# EAGLE board eagle_testfile (EAGLE 6.5.0)
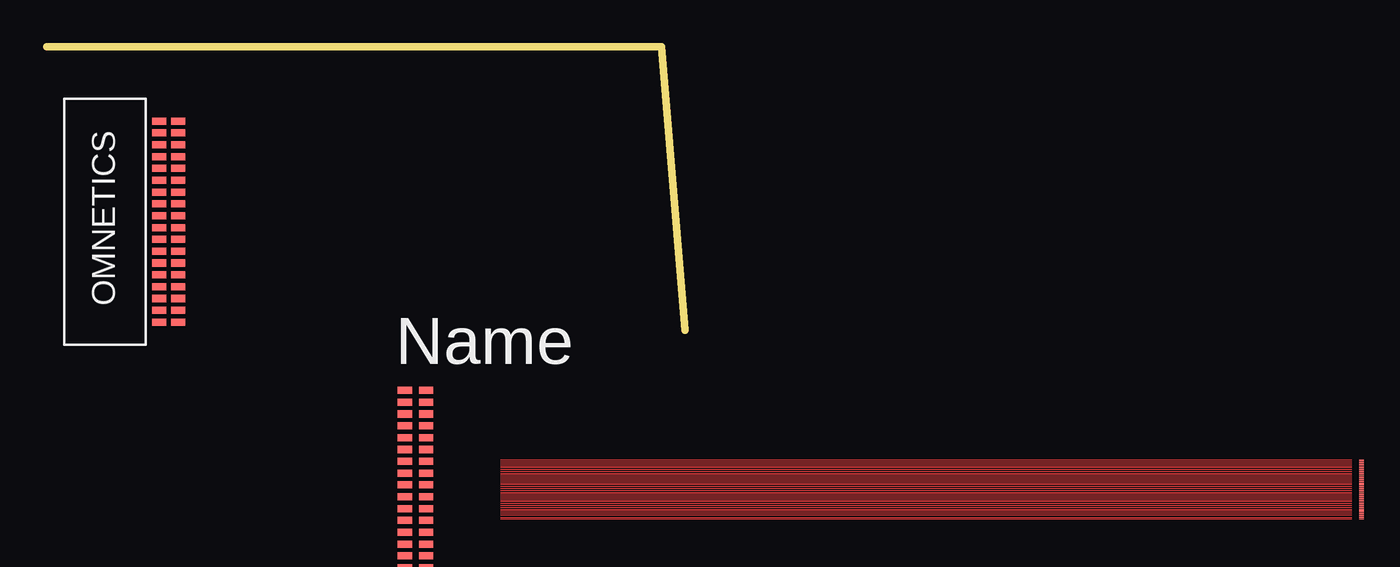
[diagram p0: board, top side]

Size 34.29 x 15.24 mm. Coordinates in mm from the lower left corner, seen from the top.
Outline: 34.29,0 33.02,15.24 0,15.24
Copper layers (1*16): Top 0.035mm / dielectric 1.5mm / Bottom 0.035mm
Design rules "default": minimum track width 10mil, minimum drill 24mil, track to track 8mil, track to pad 8mil, pad to pad 8mil, via to via 8mil, smd to smd 8mil, copper to edge 40mil, drill to drill 8mil, minimum pad ring 10mil, minimum via ring 8mil, stop-mask expansion 4mil, vias tented up to drill 0mil, thermal gap 10mil

## Footprints (pad centres in the part's own frame; a part is rotated, then mirrored left to right if it is on the bottom)
OMNETICS_A79026 = smd 0.762 x 0.381: P$1 0,0.635; P$2 0,0; P$3 0,1.27; P$4 0,1.905; P$5 0,2.54; P$6 0,3.175; P$7 0,3.81; P$8 0,4.445; P$9 0,5.08; P$10 0,5.715; P$11 0,6.35; P$12 0,6.985; P$13 0,7.62; P$14 0,8.255; P$15 0,8.89; P$16 0,9.525; P$17 0,10.16; P$18 0,10.795; P$19 1.143,0.635; P$20 1.143,0; P$21 1.143,1.27; P$22 1.143,1.905; P$23 1.143,2.54; P$24 1.143,3.175; P$25 1.143,3.81; P$26 1.143,4.445; P$27 1.143,5.08; P$28 1.143,5.715; P$29 1.143,6.35; P$30 1.143,6.985; P$31 1.143,7.62; P$32 1.143,8.255; P$33 1.143,8.89; P$34 1.143,9.525; P$35 1.143,10.16; P$36 1.143,10.795
32CH_SMD_PADS = smd 0.254 x 0.051: P$1 0,0; P$2 0,0.102; P$3 0,0.203; P$4 0,0.305; P$5 0,0.406; P$6 0,0.508; P$7 0,0.61; P$8 0,0.711; P$9 0,0.813; P$10 0,0.914; P$11 0,1.016; P$12 0,1.118; P$13 0,1.219; P$14 0,1.321; P$15 0,1.422; P$16 0,1.524; P$17 0,1.626; P$18 0,1.727; P$19 0,1.829; P$20 0,1.93; P$21 0,2.032; P$22 0,2.134; P$23 0,2.235; P$24 0,2.337; P$25 0,2.438; P$26 0,2.54; P$27 0,2.642; P$28 0,2.743; P$29 0,2.845; P$30 0,2.946; P$31 0,3.048; P$32 0,3.15
OMNETICS_A79024 = smd 0.381 x 0.762: B1 -5.397,0.711; B2 -4.763,0.711; B3 -4.128,0.711; B4 -3.493,0.711; B5 -2.857,0.711; B6 -2.223,0.711; B7 -1.587,0.711; B8 -0.953,0.711; B9 -0.318,0.711; B10 0.318,0.711; B11 0.953,0.711; B12 1.587,0.711; B13 2.223,0.711; B14 2.857,0.711; B15 3.493,0.711; B16 4.128,0.711; B17 4.763,0.711; B18 5.397,0.711; T1 -5.397,1.727; T2 -4.763,1.727; T3 -4.128,1.727; T4 -3.493,1.727; T5 -2.857,1.727; T6 -2.223,1.727; T7 -1.587,1.727; T8 -0.953,1.727; T9 -0.318,1.727; T10 0.318,1.727; T11 0.953,1.727; T12 1.587,1.727; T13 2.223,1.727; T14 2.857,1.727; T15 3.493,1.727; T16 4.128,1.727; T17 4.763,1.727; T18 5.397,1.727

## Placement (x,y rotation side)
E$1  [OMNETICS_A79026]  19.24,-14.01 0 top  (outside the outline)
E$2  [32CH_SMD_PADS]  70.61,-10.12 0 top  (outside the outline)
OMNETICS  [OMNETICS_A79024]  5.33,5.84 270 top

## Library data of the parts
E$1 = Omentics_A79026_gg
E$2 = 32ch_SMD_PADS_GG
OMNETICS = RHD2000_eval_board

## Tracks (layer width: path | path; a pad name or v marks a point on that pad's centre or on a via)
S$1
  Top 0.051: 24.38,-10.02 70.1,-10.02
S$2
  Top 0.051: 70.1,-10.12 24.38,-10.12 | 70.1,-9.92 24.38,-9.92 | 70.1,-9.82 24.38,-9.82 | 70.1,-9.72 24.38,-9.72 | 70.1,-9.61 24.38,-9.61 | 70.1,-9.51 24.38,-9.51 | 70.1,-9.41 24.38,-9.41 | 70.1,-9.31 24.38,-9.31 | 70.1,-9.21 24.38,-9.21 | 70.1,-9.11 24.38,-9.11 | 70.1,-9 24.38,-9 | 70.1,-8.9 24.38,-8.9 | 70.1,-8.8 24.38,-8.8 | 70.1,-8.7 24.38,-8.7 | 70.1,-8.6 24.38,-8.6 | 70.1,-8.5 24.38,-8.5 | 70.1,-8.29 24.38,-8.29 | 70.1,-8.19 24.38,-8.19 | 70.1,-8.39 24.38,-8.39 | 70.1,-7.99 24.38,-7.99 | 70.1,-7.89 24.38,-7.89 | 70.1,-8.09 24.38,-8.09 | 70.1,-7.78 24.38,-7.78 | 70.1,-7.68 24.38,-7.68 | 70.1,-7.58 24.38,-7.58 | 70.1,-7.48 24.38,-7.48 | 70.1,-7.38 24.38,-7.38 | 70.1,-7.28 24.38,-7.28 | 70.1,-7.18 24.38,-7.18 | 70.1,-7.07 24.38,-7.07 | 70.1,-6.97 24.38,-6.97